# EAGLE board p8x-io-card (EAGLE 9.6.2)

Size 160 x 100 mm. Coordinates in mm from the lower left corner, seen from the top.
Outline: 0,0 160,0 160,100 0,100 0,0
Copper layers (1*2*15*16): Top / Route2 / Route15 / Bottom

## Footprints (pad centres in the part's own frame; a part is rotated, then mirrored left to right if it is on the bottom)
CP_RADIAL = drill 0.9 pad 1.8: 1 0,0; 2 0,-5.08
C_DISC = drill 0.9 pad 1.8: 1 0,0; 2 0,-5.08
C_DISC1 = drill 0.9 pad 1.8: 1 0,0; 2 0,-2.54
MABC96R = drill 0.914 pad 1.524: A1 -2.54,39.37; A2 -2.54,36.83; A3 -2.54,34.29; A4 -2.54,31.75; A5 -2.54,29.21; A6 -2.54,26.67; A7 -2.54,24.13; A8 -2.54,21.59; A9 -2.54,19.05; A10 -2.54,16.51; A11 -2.54,13.97; A12 -2.54,11.43; A13 -2.54,8.89; A14 -2.54,6.35; A15 -2.54,3.81; A16 -2.54,1.27; A17 -2.54,-1.27; A18 -2.54,-3.81; A19 -2.54,-6.35; A20 -2.54,-8.89; A21 -2.54,-11.43; A22 -2.54,-13.97; A23 -2.54,-16.51; A24 -2.54,-19.05; A25 -2.54,-21.59; A26 -2.54,-24.13; A27 -2.54,-26.67; A28 -2.54,-29.21; A29 -2.54,-31.75; A30 -2.54,-34.29; A31 -2.54,-36.83; A32 -2.54,-39.37; B1 0,39.37; B2 0,36.83; B3 0,34.29; B4 0,31.75; B5 0,29.21; B6 0,26.67; B7 0,24.13; B8 0,21.59; B9 0,19.05; B10 0,16.51; B11 0,13.97; B12 0,11.43; B13 0,8.89; B14 0,6.35; B15 0,3.81; B16 0,1.27; B17 0,-1.27; B18 0,-3.81; B19 0,-6.35; B20 0,-8.89; B21 0,-11.43; B22 0,-13.97; B23 0,-16.51; B24 0,-19.05; B25 0,-21.59; B26 0,-24.13; B27 0,-26.67; B28 0,-29.21; B29 0,-31.75; B30 0,-34.29; B31 0,-36.83; B32 0,-39.37; C1 2.54,39.37; C2 2.54,36.83; C3 2.54,34.29; C4 2.54,31.75; C5 2.54,29.21; C6 2.54,26.67; C7 2.54,24.13; C8 2.54,21.59; C9 2.54,19.05; C10 2.54,16.51; C11 2.54,13.97; C12 2.54,11.43; C13 2.54,8.89; C14 2.54,6.35; C15 2.54,3.81; C16 2.54,1.27; C17 2.54,-1.27; C18 2.54,-3.81; C19 2.54,-6.35; C20 2.54,-8.89; C21 2.54,-11.43; C22 2.54,-13.97; C23 2.54,-16.51; C24 2.54,-19.05; C25 2.54,-21.59; C26 2.54,-24.13; C27 2.54,-26.67; C28 2.54,-29.21; C29 2.54,-31.75; C30 2.54,-34.29; C31 2.54,-36.83; C32 2.54,-39.37 | hole 2.794: -0.3,45; -0.3,-45
HDR3 = drill 0.9 pad 1.8: 1 0,0; 2 0,-2.54; 3 0,-5.08
DIP16 = drill 0.813 pad 1.6: 1 0,0; 2 0,-2.54; 3 0,-5.08; 4 0,-7.62; 5 0,-10.16; 6 0,-12.7; 7 0,-15.24; 8 0,-17.78; 9 7.62,-17.78; 10 7.62,-15.24; 11 7.62,-12.7; 12 7.62,-10.16; 13 7.62,-7.62; 14 7.62,-5.08; 15 7.62,-2.54; 16 7.62,0
LED5 = drill 0.9 pad 1.8: 1 2.54,0; 2 0,0
R_AXIAL = drill 0.8 pad 1.6: 1 0,0; 2 10.16,0
SIP16 = drill 0.8 pad 1.6: 1 0,-2.54; 2 0,-5.08; 3 0,-7.62; 4 0,-10.16; 5 0,-12.7; 6 0,-15.24; 7 0,-17.78; 8 0,-20.32; 9 0,-22.86; 10 0,-25.4; 11 0,-27.94; 12 0,-30.48; 13 0,-33.02; 14 0,-35.56; 15 0,-38.1; 16 0,-40.64
SIP9 = drill 0.8 pad 1.6: 1 0,0; 2 0,-2.54; 3 0,-5.08; 4 0,-7.62; 5 0,-10.16; 6 0,-12.7; 7 0,-15.24; 8 0,-17.78; 9 0,-20.32
DIP14 = drill 0.813 pad 1.6: 1 0,0; 2 0,-2.54; 3 0,-5.08; 4 0,-7.62; 5 0,-10.16; 6 0,-12.7; 7 0,-15.24; 8 7.62,-15.24; 9 7.62,-12.7; 10 7.62,-10.16; 11 7.62,-7.62; 12 7.62,-5.08; 13 7.62,-2.54; 14 7.62,0
DIP20 = drill 0.813 pad 1.6: 1 0,0; 2 0,-2.54; 3 0,-5.08; 4 0,-7.62; 5 0,-10.16; 6 0,-12.7; 7 0,-15.24; 8 0,-17.78; 9 0,-20.32; 10 0,-22.86; 11 7.62,-22.86; 12 7.62,-20.32; 13 7.62,-17.78; 14 7.62,-15.24; 15 7.62,-12.7; 16 7.62,-10.16; 17 7.62,-7.62; 18 7.62,-5.08; 19 7.62,-2.54; 20 7.62,0
DIP24W = drill 0.813 pad 1.6: 1 0,0; 2 0,-2.54; 3 0,-5.08; 4 0,-7.62; 5 0,-10.16; 6 0,-12.7; 7 0,-15.24; 8 0,-17.78; 9 0,-20.32; 10 0,-22.86; 11 0,-25.4; 12 0,-27.94; 13 15.24,-27.94; 14 15.24,-25.4; 15 15.24,-22.86; 16 15.24,-20.32; 17 15.24,-17.78; 18 15.24,-15.24; 19 15.24,-12.7; 20 15.24,-10.16; 21 15.24,-7.62; 22 15.24,-5.08; 23 15.24,-2.54; 24 15.24,0
DIP8 = drill 0.813 pad 1.6: 1 0,0; 2 0,-2.54; 3 0,-5.08; 4 0,-7.62; 5 7.62,-7.62; 6 7.62,-5.08; 7 7.62,-2.54; 8 7.62,0
OSC4 = drill 0.8 pad 1.6: 1 0,0; 7 0,-15.24; 8 7.62,-15.24; 14 7.62,0

## Placement (x,y rotation side)
BT1  CR2032  [CP_RADIAL]  229.07,-1.32 0 top  (outside the outline)
C2  1uF  [C_DISC]  299.69,40.98 0 top  (outside the outline)
C3  1uF  [C_DISC]  304.09,40.98 0 top  (outside the outline)
C4  1uF  [C_DISC]  308.49,40.98 0 top  (outside the outline)
C5  1uF  [C_DISC]  312.89,40.98 0 top  (outside the outline)
CD1  100nF  [C_DISC1]  215.19,95.1 0 top  (outside the outline)
CD2  100nF  [C_DISC1]  231.41,95.1 0 top  (outside the outline)
CD3  100nF  [C_DISC1]  247.63,95.1 0 top  (outside the outline)
CD4  100nF  [C_DISC1]  263.85,95.1 0 top  (outside the outline)
CD5  100nF  [C_DISC1]  280.07,95.1 0 top  (outside the outline)
CD6  100nF  [C_DISC1]  296.29,95.1 0 top  (outside the outline)
CD7  100nF  [C_DISC1]  312.51,95.1 0 top  (outside the outline)
CD8  100nF  [C_DISC1]  328.73,95.1 0 top  (outside the outline)
CD9  100nF  [C_DISC1]  215.19,73.12 0 top  (outside the outline)
CD10  100nF  [C_DISC1]  231.41,73.12 0 top  (outside the outline)
CD11  100nF  [C_DISC1]  247.63,73.12 0 top  (outside the outline)
CD12  100nF  [C_DISC1]  263.85,73.12 0 top  (outside the outline)
CD13  100nF  [C_DISC1]  280.07,73.12 0 top  (outside the outline)
CD14  100nF  [C_DISC1]  303.91,73.12 0 top  (outside the outline)
CD15  100nF  [C_DISC1]  320.13,73.12 0 top  (outside the outline)
CD16  100nF  [C_DISC1]  336.35,73.12 0 top  (outside the outline)
J1  MABC96R  [MABC96R]  193.34,49.6 0 top  (outside the outline)
J2  1x3  [HDR3]  295.29,40.98 0 top  (outside the outline)
J3  1x3  [HDR3]  233.47,-1.32 0 top  (outside the outline)
LA1  8-LED BAR  [DIP16]  235.31,41.08 0 top  (outside the outline)
LED3  GRN  [LED5]  331.65,40.98 0 top  (outside the outline)
LED4  YEL  [LED5]  217.73,-1.32 0 top  (outside the outline)
LM1  A0-7  [DIP16]  251.33,41.08 0 top  (outside the outline)
LM2  A8-15  [DIP16]  267.35,41.08 0 top  (outside the outline)
LM3  D0-7  [DIP16]  283.37,41.08 0 top  (outside the outline)
R4  1K  [R_AXIAL]  203.27,-1.22 0 top  (outside the outline)
RL1  8X330R  [SIP16]  231.11,43.62 0 top  (outside the outline)
RM1  8X330R  [SIP16]  247.13,43.62 0 top  (outside the outline)
RM2  8X330R  [SIP16]  263.15,43.62 0 top  (outside the outline)
RM3  8X330R  [SIP16]  279.17,43.62 0 top  (outside the outline)
RNP  8X10K  [SIP9]  226.91,41.08 0 top  (outside the outline)
RP1  1K  [R_AXIAL]  317.19,41.08 0 top  (outside the outline)
SW1  INPUT  [DIP16]  215.09,41.08 0 top  (outside the outline)
U1  74HCT30  [DIP14]  203.27,95.2 0 top  (outside the outline)
U2  74HCT138  [DIP16]  219.49,95.2 0 top  (outside the outline)
U3  74HCT138  [DIP16]  235.71,95.2 0 top  (outside the outline)
U4  74HCT138  [DIP16]  251.93,95.2 0 top  (outside the outline)
U5  74HCT32  [DIP14]  268.15,95.2 0 top  (outside the outline)
U6  74HCT08  [DIP14]  284.37,95.2 0 top  (outside the outline)
U7  74HCT161  [DIP16]  300.59,95.2 0 top  (outside the outline)
U8  MAX232  [DIP16]  316.81,95.2 0 top  (outside the outline)
U9  74HCT244  [DIP20]  203.27,73.22 0 top  (outside the outline)
U10  74HCT374  [DIP20]  219.49,73.22 0 top  (outside the outline)
U11  74HCT244  [DIP20]  235.71,73.22 0 top  (outside the outline)
U12  74HCT244  [DIP20]  251.93,73.22 0 top  (outside the outline)
U13  74HCT244  [DIP20]  268.15,73.22 0 top  (outside the outline)
U14  6850  [DIP24W]  284.37,73.22 0 top  (outside the outline)
U15  74HCT00  [DIP14]  308.21,73.22 0 top  (outside the outline)
U16  DS1302  [DIP8]  324.43,73.22 0 top  (outside the outline)
X2  2.4576MHZ  [OSC4]  203.27,41.08 0 top  (outside the outline)
X3  32.768KHZ  [C_DISC]  224.67,-1.32 0 top  (outside the outline)

## Library data of the parts
BT1 C2-C5 CD1-CD16 J1-J3 LA1 LED3 LED4 LM1-LM3 R4 RL1 RM1-RM3 RNP RP1 SW1 U1-U16 X2 X3 = p8x

## Nets
-MEMW: U4.7 U5.5 U5.13 U14.13
-P0: U2.15 U5.1
-P1: U2.14 U5.4
-P2: U2.13 U14.9 U15.4 U15.5
-RD: U3.7 U5.2 U5.12
-RES: J1.A11
-SWOE: U5.3 U9.1 U9.19
A0: J1.C3 U11.2 U14.11
A1: J1.C4 U2.1 U11.4
A2: J1.C5 U2.2 U11.6
A3: J1.C6 U2.3 U11.8
A4: J1.C7 U11.11
A5: J1.C8 U11.13
A6: J1.C9 U11.15
A7: J1.C10 U11.17
A8: J1.C11 U1.1 U12.2
A9: J1.C12 U1.2 U12.4
A10: J1.C13 U1.3 U12.6
A11: J1.C14 U1.4 U12.8
A12: J1.C15 U1.5 U12.11
A13: J1.C16 U1.6 U12.13
A14: J1.C17 U1.11 U12.15
A15: J1.C18 U1.12 U12.17
ACCP: U6.10 U15.11
BCLK: U7.11 U14.3 U14.4
BOEISH: U5.11 U15.12 U15.13
BOSC: U7.2 X2.8
C1MN: C2.2 U8.3
C1PN: C2.1 U8.1
C2MN: C3.2 U8.5
C2PN: C3.1 U8.4
CLKB: J1.A25 U6.5 U15.1 U15.2
CLKBN: U5.10 U15.3
D0: J1.A3 U9.18 U10.3 U13.2 U14.22
D1: J1.A4 U9.16 U10.4 U13.4 U14.21
D2: J1.A5 U9.14 U10.7 U13.6 U14.20
D3: J1.A6 U9.12 U10.8 U13.8 U14.19
D4: J1.A7 U9.9 U10.13 U13.11 U14.18
D5: J1.A8 U9.7 U10.14 U13.13 U14.17
D6: J1.A9 U9.5 U10.17 U13.15 U14.16
D7: J1.A10 U9.3 U10.18 U13.17 U14.15
DLD0: J1.A16 U4.1
DLD1: J1.A17 U4.2
DLD2: J1.A18 U4.3
DLD3: J1.A19 U4.4
DOE0: J1.A12 U3.1
DOE1: J1.A13 U3.2
DOE2: J1.A14 U3.3
DOE3: J1.A15 U3.4
EEN: U6.6 U14.14
GND: BT1.2 C4.2 C5.2 CD1.2 CD2.2 CD3.2 CD4.2 CD5.2 CD6.2 CD7.2 CD8.2 CD9.2 CD10.2 CD11.2 CD12.2 CD13.2 CD14.2 CD15.2 CD16.2 J1.A31 J1.A32 J1.B3 J1.B5 J1.B7 J1.B9 J1.B11 J1.B13 J1.B15 J1.B17 J1.B19 J1.B21 J1.B23 J1.B25 J1.B31 J1.B32 J1.C31 J1.C32 J2.3 LA1.9 LA1.10 LA1.11 LA1.12 LA1.13 LA1.14 LA1.15 LA1.16 LED3.1 LED4.1 LM1.9 LM1.10 LM1.11 LM1.12 LM1.13 LM1.14 LM1.15 LM1.16 LM2.9 LM2.10 LM2.11 LM2.12 LM2.13 LM2.14 LM2.15 LM2.16 LM3.9 LM3.10 LM3.11 LM3.12 LM3.13 LM3.14 LM3.15 LM3.16 SW1.9 SW1.10 SW1.11 SW1.12 SW1.13 SW1.14 SW1.15 SW1.16 U1.7 U2.5 U2.8 U3.5 U3.8 U4.5 U4.8 U5.7 U6.1 U6.2 U6.7 U7.3 U7.4 U7.5 U7.6 U7.8 U8.15 U9.10 U10.1 U10.10 U11.1 U11.10 U11.19 U12.1 U12.10 U12.19 U13.1 U13.10 U13.19 U14.1 U14.23 U14.24 U15.7 U16.4 X2.7
IOPG: U1.8 U2.4 U15.9 U15.10
IOPGN: U6.9 U15.8
LCK: U5.8 U10.11
LED4A: LED4.2 R4.1
LEDP: LED3.2 RP1.2
LP0: RL1.1 U10.2
LP1: RL1.3 U10.5
LP2: RL1.5 U10.6
LP3: RL1.7 U10.9
LP4: RL1.9 U10.12
LP5: RL1.11 U10.15
LP6: RL1.13 U10.16
LP7: RL1.15 U10.19
LR0: LA1.1 RL1.2
LR1: LA1.2 RL1.4
LR2: LA1.3 RL1.6
LR3: LA1.4 RL1.8
LR4: LA1.5 RL1.10
LR5: LA1.6 RL1.12
LR6: LA1.7 RL1.14
LR7: LA1.8 RL1.16
LW1: U5.6 U5.9
MA0: RM1.1 U11.18
MA1: RM1.3 U11.16
MA2: RM1.5 U11.14
MA3: RM1.7 U11.12
MA4: RM1.9 U11.9
MA5: RM1.11 U11.7
MA6: RM1.13 U11.5
MA7: RM1.15 U11.3
MA8: RM2.1 U12.18
MA9: RM2.3 U12.16
MA10: RM2.5 U12.14
MA11: RM2.7 U12.12
MA12: RM2.9 U12.9
MA13: RM2.11 U12.7
MA14: RM2.13 U12.5
MA15: RM2.15 U12.3
MD0: RM3.1 U13.18
MD1: RM3.3 U13.16
MD2: RM3.5 U13.14
MD3: RM3.7 U13.12
MD4: RM3.9 U13.9
MD5: RM3.11 U13.7
MD6: RM3.13 U13.5
MD7: RM3.15 U13.3
ML0_0: LM1.1 RM1.2
ML0_1: LM1.2 RM1.4
ML0_2: LM1.3 RM1.6
ML0_3: LM1.4 RM1.8
ML0_4: LM1.5 RM1.10
ML0_5: LM1.6 RM1.12
ML0_6: LM1.7 RM1.14
ML0_7: LM1.8 RM1.16
ML1_0: LM2.1 RM2.2
ML1_1: LM2.2 RM2.4
ML1_2: LM2.3 RM2.6
ML1_3: LM2.4 RM2.8
ML1_4: LM2.5 RM2.10
ML1_5: LM2.6 RM2.12
ML1_6: LM2.7 RM2.14
ML1_7: LM2.8 RM2.16
ML2_0: LM3.1 RM3.2
ML2_1: LM3.2 RM3.4
ML2_2: LM3.3 RM3.6
ML2_3: LM3.4 RM3.8
ML2_4: LM3.5 RM3.10
ML2_5: LM3.6 RM3.12
ML2_6: LM3.7 RM3.14
ML2_7: LM3.8 RM3.16
P2P: U6.4 U15.6
RTCCE: J3.1 U16.5
RTCIO: J3.3 U16.6
RTCSCLK: J3.2 U16.7
RTCX1: U16.2 X3.1
RTCX2: U16.3 X3.2
RXD: U8.12 U14.2
SELP: R4.2 U6.8
SIN: J2.2 U8.13
SOUT: J2.1 U8.14
SWN0: RNP.2 SW1.1 U9.2
SWN1: RNP.3 SW1.2 U9.4
SWN2: RNP.4 SW1.3 U9.6
SWN3: RNP.5 SW1.4 U9.8
SWN4: RNP.6 SW1.5 U9.11
SWN5: RNP.7 SW1.6 U9.13
SWN6: RNP.8 SW1.7 U9.15
SWN7: RNP.9 SW1.8 U9.17
TXD: U8.11 U14.6
VBAT: BT1.1 U16.1
VCC: CD1.1 CD2.1 CD3.1 CD4.1 CD5.1 CD6.1 CD7.1 CD8.1 CD9.1 CD10.1 CD11.1 CD12.1 CD13.1 CD14.1 CD15.1 CD16.1 J1.A1 J1.A2 J1.B1 J1.B2 J1.C1 J1.C2 RNP.1 RP1.1 U1.14 U2.6 U2.16 U3.6 U3.16 U4.6 U4.16 U5.14 U6.14 U7.1 U7.7 U7.9 U7.10 U7.16 U8.16 U9.20 U10.20 U11.20 U12.20 U13.20 U14.8 U14.10 U14.12 U15.14 U16.8 X2.14
VMN: C5.1 U8.6
VPN: C4.1 U8.2

## Text on the board
tPlace: P8X I/O CARD REV A - ACIA + SWITCHES + LEDS + BUS MONITOR